# Altium PCB part5.PcbDoc
Units mil, origin at the board's own origin, x right, y up, seen from the top; angles counter-clockwise.
Board outline 6259.84 x 2795.28 mil, 2 copper layers (Top Layer, Top, Bottom Layer, Bottom); 19 components, 15 nets, 49 pads, 0 vias.
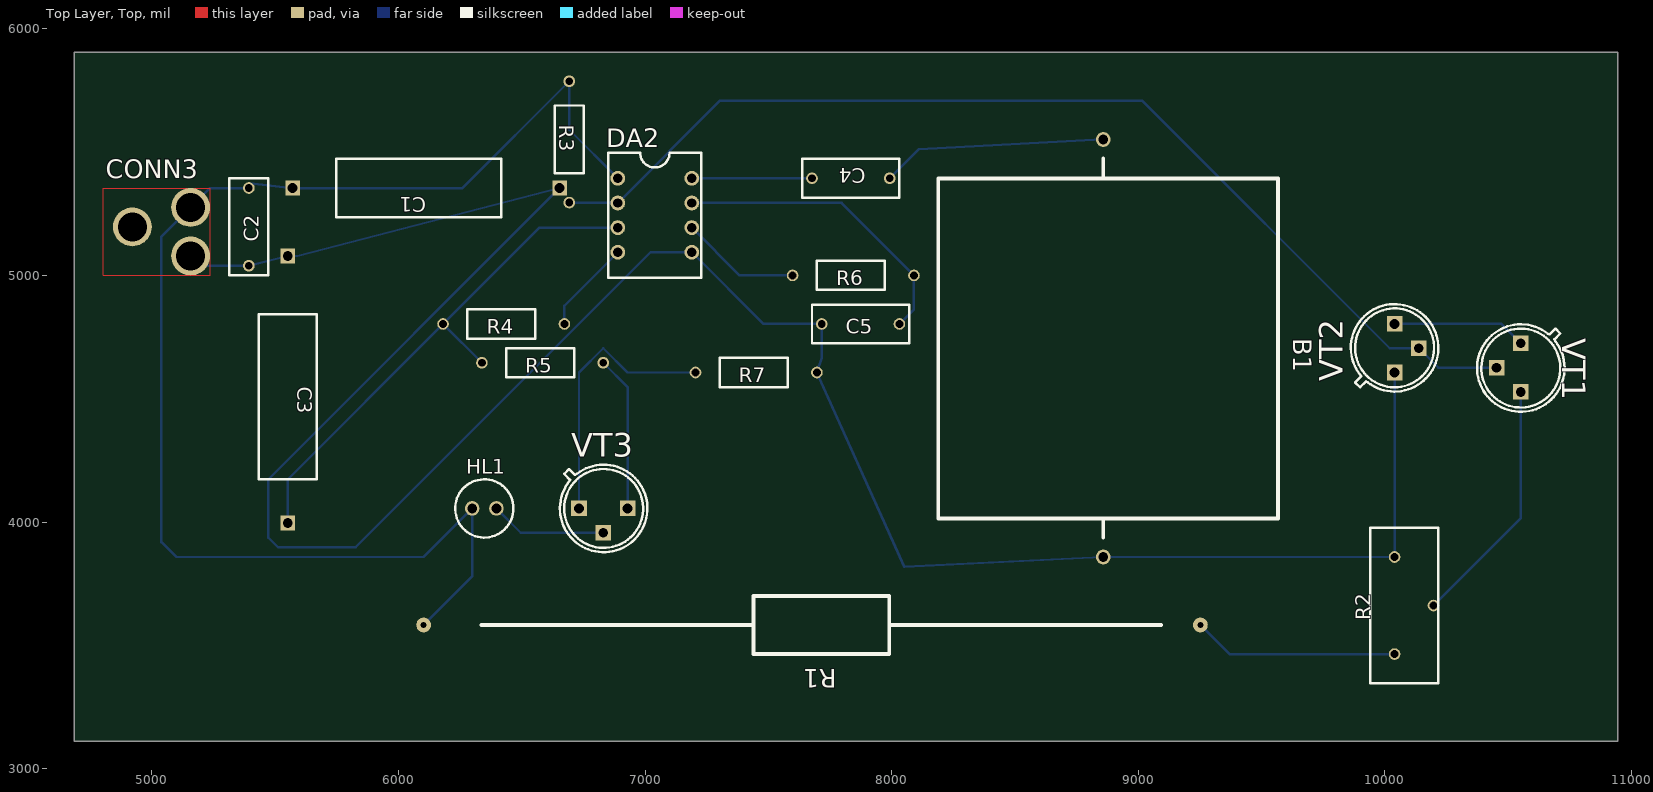
[diagram p0: Top Layer, Top view]
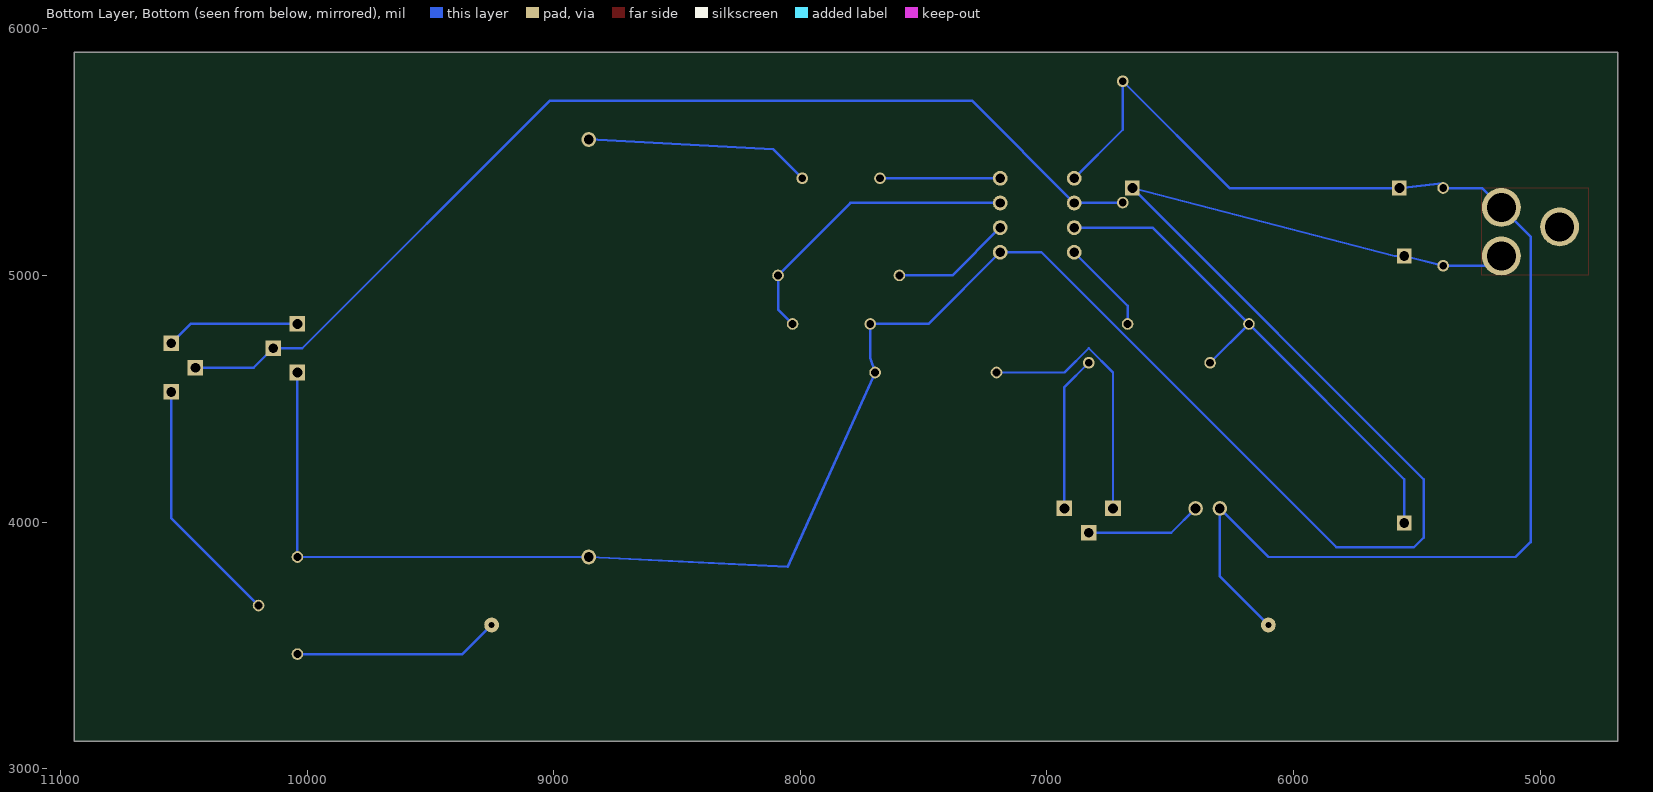
[diagram p1: Bottom Layer, Bottom view, seen from below]

## Layer stack, top to bottom
Top Solder, Top Mask: solder mask 0.4, Solder Resist, Dk 3.5
Top Layer, Top: signal copper 1.4
Dielectric 1: dielectric 12.6, FR-4, Dk 4.8
Bottom Layer, Bottom: signal copper 1.4
Bottom Solder, Bot Mask: solder mask 0.4, Solder Resist, Dk 3.5

## Board outline
4685.04,3110.24 10944.88,3110.24 10944.88,5905.51 4685.04,5905.51

## Design rules (kind name [scope] priority, off if disabled: settings)
Clearance [All] p1: gap=10 ignorepadtopadclearanceinfootprint=FALSE except(0: Arc-Hole Track-Hole SMDPad-Hole THPad-Hole Via-Hole Fill-Hole Poly-Hole Region-Hole Text-Hole; 11.81: Arc-Arc Arc-Track Arc-THPad Arc-Via Track-Track Track-THPad Track-Via THPad-THPad THPad-Via Via-Via)
PlaneClearance [All] p1: clearance=10
PolygonConnect [All] p1: connectstyle=Relief reliefconductorwidth=10 reliefentries=4 polygonreliefangle="90 Angle" airgapwidth=10
RoomDefinition [All] p1: confinementstyle=ConfineIn formatcopy=TRUE lockcomponents=FALSE outline 4685.04,3110.24 10944.88,3110.24 10944.88,5905.51 4685.04,5905.51
RoutingVias [All] p1: holewidth=28 width=50 viastyle="Through Hole" minholewidth=28 minwidth=50 maxholewidth=28 maxwidth=50
SolderMaskExpansion [All] p1: expansion=4
Width [All] p1: maxlimit=10 minlimit=10 preferedwidth=10
29 further rules are at their usual default settings.

## Components (designator, comment, footprint, x,y, rotation, side; value= is the part's Value field where it differs from the comment)
B1 "" ЗП-3 8858.27,5551.18 r270 top
C1 "200mk" "К50-29 (17Х6)" 6653.54,5354.33 r180 top
C2 "0.1mk" "K71-6 (10X4)" 5393.7,5039.37 r90 top
C3 "0.5mk" "К50-29 (17Х6)" 5551.18,5078.74 r270 top
C4 "0.33mk" "K71-6 (10X4)" 7992.13,5393.7 r180 top
C5 "0.01mk" "K71-6 (10X4)" 7716.54,4803.15 r0 top
CONN3 "" CONN2X 5157.48,5275.59 r0 top
DA2 "" КР1436АП1 6889.76,5393.7 r0 top
HL1 "{Value}" АЛ307 6299.21,4055.12 r0 top
R1 "47k" MMT-1 9251.97,3582.68 r180 top
R2 "10k" СП3-38В 10039.37,3464.57 r90 top
R3 "22k" МЛТ(0.25) 6692.91,5787.4 r270 top
R4 "22k" МЛТ(0.25) 6181.1,4803.15 r0 top
R5 "1k" МЛТ(0.25) 6338.58,4645.67 r0 top
R6 "120k" МЛТ(0.25) 7598.43,5000 r0 top
R7 "180" МЛТ(0.25) 7204.72,4606.3 r0 top
VT1 "" KT3102A 10551.18,4724.41 r270 top
VT2 "" KT3102A 10039.37,4606.3 r90 top
VT3 "" KT3102A 6732.28,4055.12 r0 top

## Footprints (in the part's own frame and the unit in brackets; to place one, negate y for a bottom-side part, rotate by r counter-clockwise, add the part's x,y. Pads: shape width x height; smd on the part's side, far side on the other; paste and mask are expansions set on the pad)
CONN2X [mm]
  round 4 hole 3: 1(0,0) 2(0,-5) 3(-6,-2)
  Top Layer, Top lines w0.1: -9,-7 2,-7 2,2 -9,2 -9,-7
"K71-6 (10X4)" [mm]
  round 1.2 hole 0.8: 1(0,0) 2(8,0)
  silkscreen extent -1,-2 9,2
KT3102A [mm]
  rect 1.6x1.6 hole 1: 1(0,0) 2(5,0) 3(2.5,-2.5)
  silkscreen extent -1.97,-4.5 7.04,4.51
MMT-1 [mil]
  round 60 hole 23.62: 1(0,0) 2(3149.61,0)
  silkscreen extent 159,-118 2915,118
АЛ307 [mm]
  round 1.5 hole 1: 1(0,0) 2(2.5,0)
  silkscreen extent -1.75,-3 4.25,3
ЗП-3 [mil]
  round 60 hole 39.37: 1(0,0) 2(1692.91,0)
  silkscreen extent 76,-669 1615,709
"К50-29 (17Х6)" [mm]
  rect 1.5x1.5 hole 1: 1(0,0) 2(27.5,0)
  silkscreen extent 6,-3 23,3
КР1436АП1 [mil]
  round 60 hole 38: 1(0,0) 2(0,-100) 3(0,-200) 4(0,-300) 5(300,-300) 6(300,-200) 7(300,-100) 8(300,0)
  silkscreen extent -39,-404 339,104
МЛТ(0.25) [mm]
  round 1.2 hole 0.8: 1(0,0) 2(12.5,0)
  silkscreen extent 2.5,-1.5 9.5,1.5
СП3-38В [mm]
  round 1.2 hole 0.8: 1(0,0) 2(10,0) 3(5,-4)
  silkscreen extent -3,-4.5 13,2.5

## Nets (pads, with @x,y where several pads share a name; then routed paths per layer and width w, separated by ;. In a path a pad name is that pad's centre, name@x,y a point inside that pad or via, vN(x,y) a via of type N, cw(c..) or ccw(c..) an arc to the next point about the centre after c; other vN are vias at no path point)
1: B1.2 C1.1 C2.1 C3.1 C5.1 CONN3.2 DA2.5 R2.2 R7.2 VT2.1 | length 10135.8
  Bottom Layer, Bottom w10: CONN3.2 5196.85,5039.37 C2.1 C3.1 5590.55,5078.74 C1.1 5472.44,4173.23 5472.44,3937.01 5511.81,3897.64 5826.77,3897.64 7022.83,5093.7 DA2.5 7480.32,4803.15 C5.1 7716.54,4665.35 R7.2 8051.18,3818.9 B1.2 R2.2 VT2.1
16B: C3.2 DA2.3 R4.1 R5.1 | length 2161.1
  Bottom Layer, Bottom w10: C3.2 5551.18,4173.23 R4.1 ; R5.1 R4.1 ; DA2.3 6571.65,5193.7 R4.1
NET00001: VT1.1 VT2.2 | length 544.4
  Bottom Layer, Bottom w10: VT2.2 10472.44,4803.15 VT1.1
NET00002: R2.3 VT1.2 | length 1012.9
  Bottom Layer, Bottom w10: R2.3 10551.18,4015.75 VT1.2
NET00004: C1.2 C2.2 CONN3.1 DA2.1 HL1.1 R1.2 R3.1 | length 5569.5
  Bottom Layer, Bottom w10: R1.2 6299.21,3779.53 HL1.1 6102.36,3858.27 5100,3858.27 5039.37,3918.9 5039.37,5157.48 CONN3.1 5236.22,5354.33 C2.2 5393.7,5374.02 5395.86,5373.78 C1.2 6259.84,5354.33 R3.1 6692.91,5590.55 DA2.1
NET00005: C4.2 DA2.8 | length 487.4
  Bottom Layer, Bottom w10: DA2.8 C4.2
NET00006: C5.2 DA2.7 R6.2 | length 1243.8
  Bottom Layer, Bottom w10: DA2.7 7796.85,5293.7 R6.2 8090.55,4862.21 C5.2
NET00007: R7.1 VT3.1 | length 1105.2
  Bottom Layer, Bottom w10: VT3.1 6732.28,4606.3 6830.71,4704.72 6929.13,4606.3 R7.1
NET00008: HL1.2 VT3.3 | length 473.8
  Bottom Layer, Bottom w10: HL1.2 6496.06,3956.69 VT3.3
NET00009: R5.2 VT3.2 | length 631.3
  Bottom Layer, Bottom w10: R5.2 6929.13,4547.24 VT3.2
NET00010: R1.1 R2.1 | length 836.3
  Bottom Layer, Bottom w10: R1.1 9370.08,3464.57 R2.1
NET00011: B1.1 C4.1 | length 916.1
  Bottom Layer, Bottom w10: C4.1 8110.24,5511.81 B1.1
NET00012: DA2.4 R4.2 | length 380.2
  Bottom Layer, Bottom w10: R4.2 6673.23,4877.16 DA2.4
NET00013: DA2.6 R6.1 | length 488.9
  Bottom Layer, Bottom w10: DA2.6 7383.46,5000 R6.1
VT1,VT2,KT3102A: DA2.2 R3.2 VT1.3 VT2.3 | length 4380.8
  Bottom Layer, Bottom w10: R3.2 6694.49,5293.7 DA2.2 7304.73,5708.66 9015.75,5708.66 10019.69,4704.72 VT2.3 10216.54,4625.98 VT1.3
pads on no net: CONN3.3